# Altium PCB 468524-L.PcbDoc (part 4 of 4)
Units mm, origin at the board's own origin, x right, y up, seen from the top; angles counter-clockwise.
Board outline 160 x 90 mm, 2 copper layers (Top Layer, Bottom Layer), stack 1.571 mm thick; 225 components, 131 nets, 717 pads, 560 vias.
Unrouted connection lines stored in the file: 2.
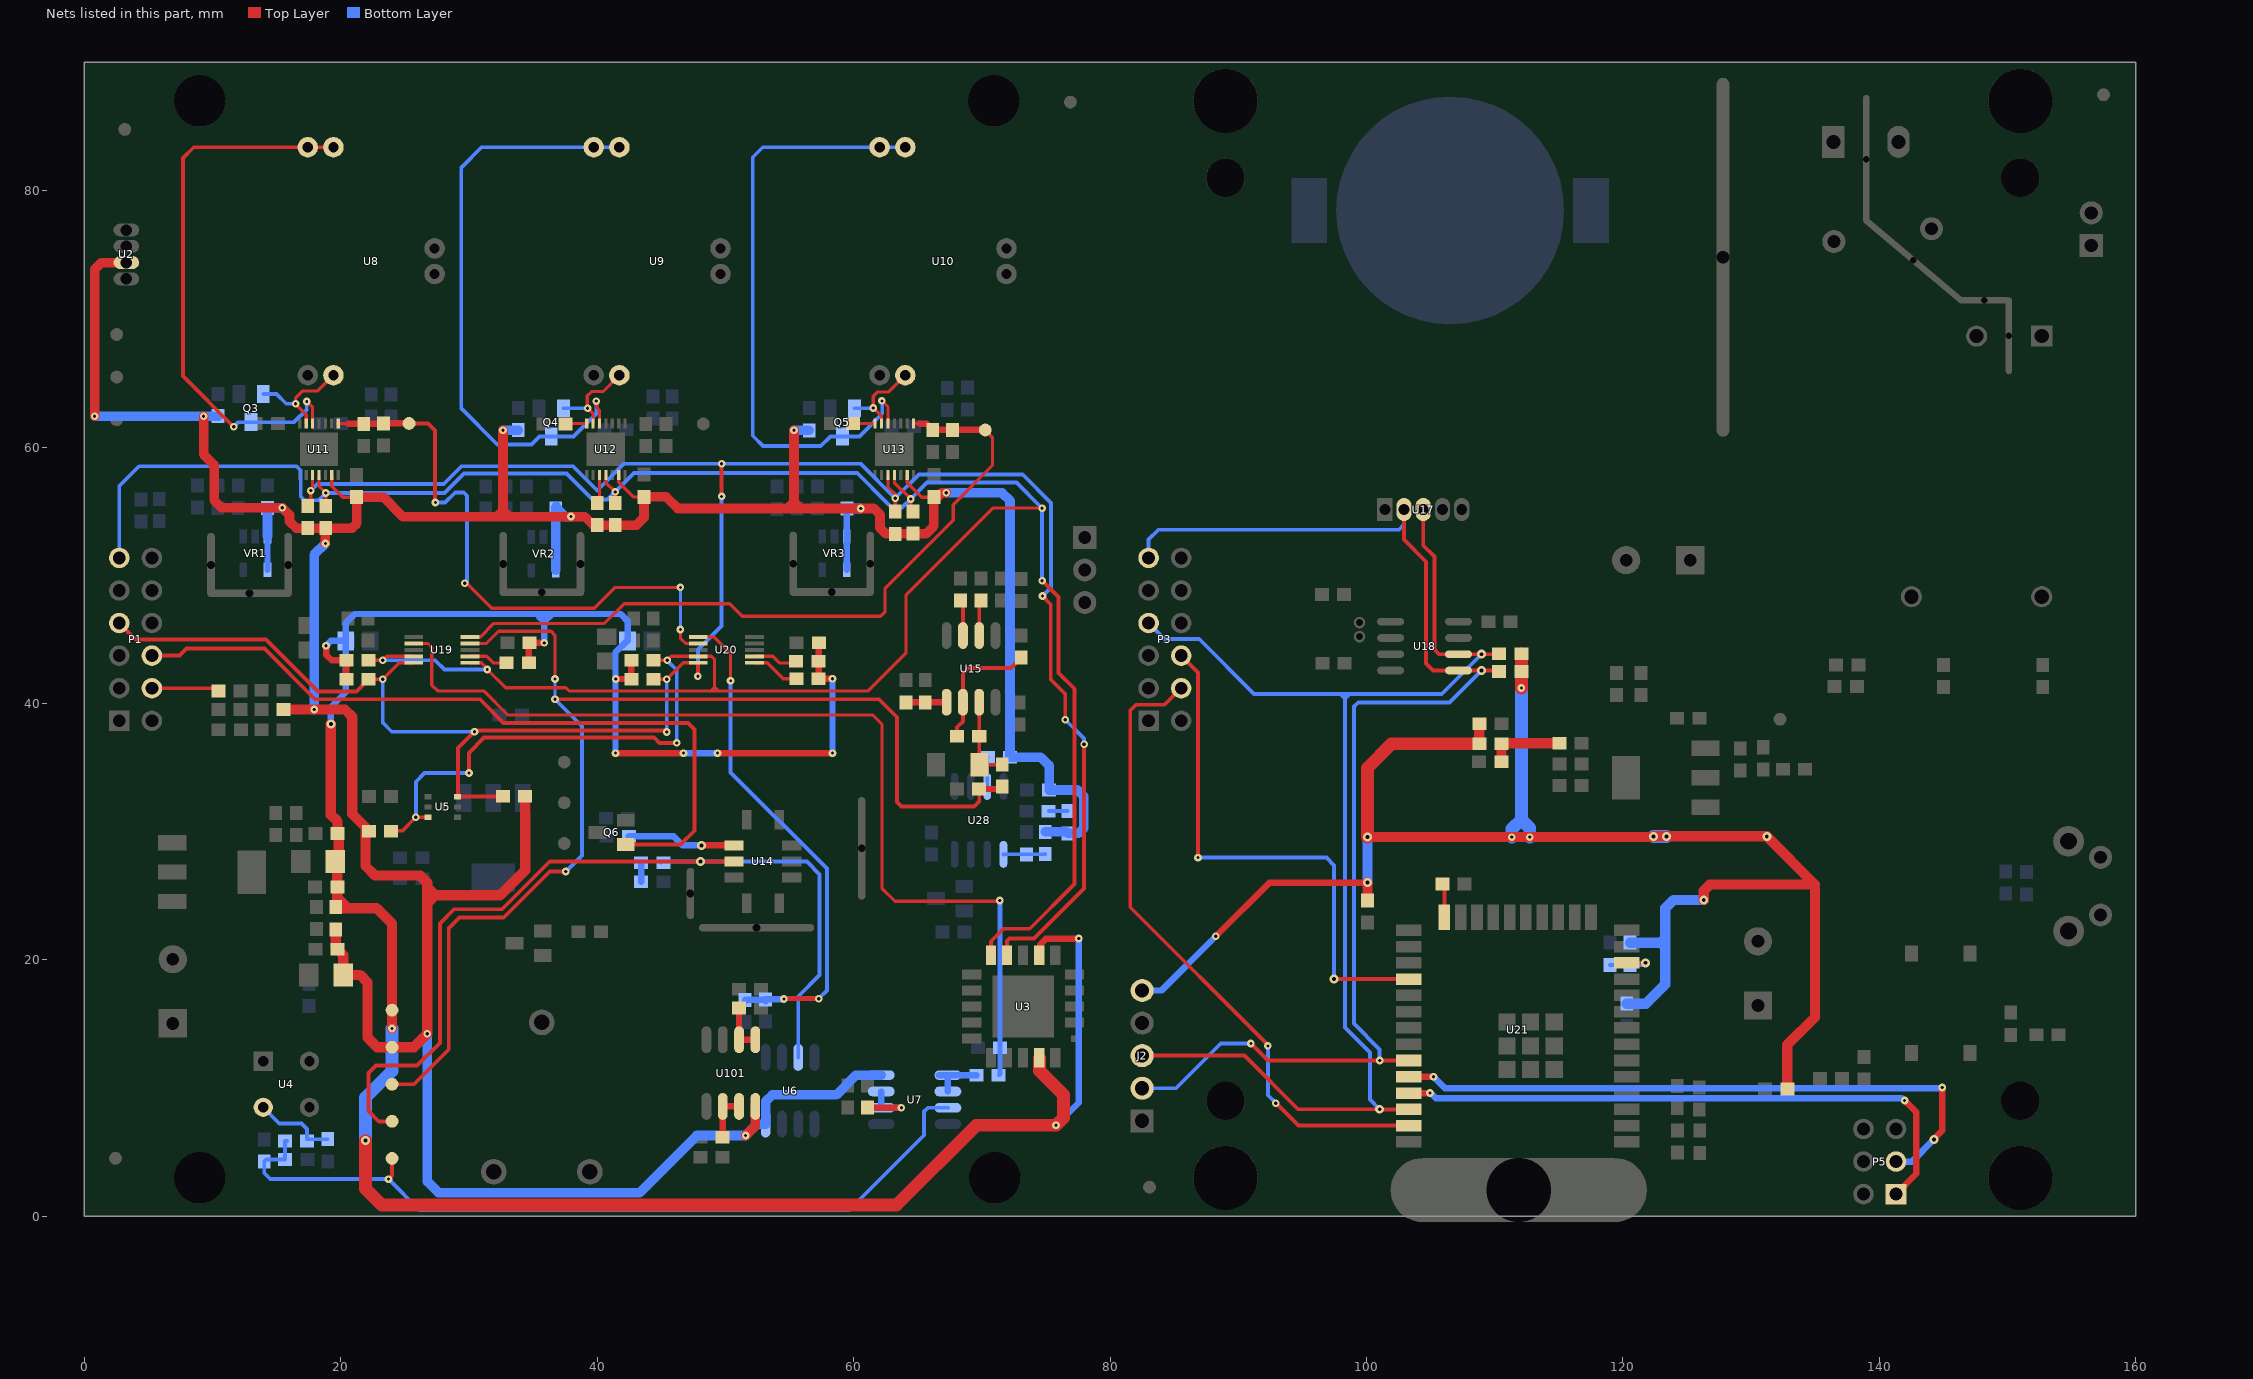
[diagram p3: the nets of this part, all layers, seen from the top]

## Via types
v1: diameter 0.6, hole 0.25, Top Layer to Bottom Layer, tented both sides, 365 vias
v2: diameter 0.7, hole 0.3, Top Layer to Bottom Layer, tented both sides, 179 vias
v3: diameter 0.6, hole 0.2, Top Layer to Bottom Layer, 12 vias
v4: diameter 0.6, hole 0.2, Top Layer to Bottom Layer, tented both sides, 3 vias
v5: diameter 0.6, hole 0.3, Top Layer to Bottom Layer, tented both sides, 1 vias

## Nets (pads, with @x,y where several pads share a name; then routed paths per layer and width w, separated by ;. In a path a pad name is that pad's centre, name@x,y a point inside that pad or via, vN(x,y) a via of type N, cw(c..) or ccw(c..) an arc to the next point about the centre after c; other vN are vias at no path point) (continued)
NetR18_2: R18.2 U7.1 U7.2 | length 4.2
  Bottom Layer w0.5: U7.1@66.647,11.005 U7.1@67.347,11.005 ; U7.2@67.347,9.735 U7.1@67.347,11.005 ; R18.2@69.58,11 69.575,11.005 U7.1@67.347,11.005
NetR19_2: R19.2 U15.2 | length 2.8
  Top Layer w0.3: U15.2@69.791,45.295 69.791,47.871 R19.2@69.931,48.011
NetR21_1: R21.1 R22.2 U4.2 | length 6.5
  Bottom Layer w0.3: R22.2@17.366,6.014 R21.1@18.975,6.014
  Bottom Layer w0.305: U4.2@13.952,8.5 15.202,7.25 16.925,7.25 17.366,6.809 R22.2@17.366,6.014
NetR33_2: R33.2 U15.3 | length 2.8
  Top Layer w0.3: R33.2@68.336,48.011 68.521,47.826 U15.3@68.521,45.295
NetR35_2: R35.2 U14.2 | length 8.5
  Top Layer w0.5: v2(48.125,28.925) U14.2@50.675,28.925
  Bottom Layer w0.5: R35.2@42.464,29.645 45.955,29.645 46.675,28.925 v2(48.125,28.925)
NetR37_1: R37.1 R38.2 | length 1.5
  Bottom Layer w0.5: R38.2@43.431,26.093 R37.1@43.431,27.587
NetR41_2: R41.2 U12.3 | length 2.3
  Top Layer w0.2: R41.2@39.993,55.639 R41.2@40.175,55.821
  Top Layer w0.25: R41.2@40.175,55.821 U12.3@40.175,57.825
NetR43_2: R43.2 U12.14 | length 1.6
  Top Layer w0.229: R43.2@37.539,61.8 R43.2@37.564,61.825
  Top Layer w0.25: R43.2@37.564,61.825 U12.14@39.175,61.825
NetR49_2: R49.2 U13.14 | length 1.7
  Top Layer w0.25: R49.2@59.966,61.839 59.98,61.825 U13.14@61.675,61.825
NetR52_2: R52.2 R54.2 U15.5 | length 3.2
  Top Layer w0.5: R52.2@64.075,40.086 R54.2@65.575,40.086 67.242,40.086 U15.5@67.251,40.095
NetR53_2: R53.2 R55.1 U15.6 | length 10.1
  Top Layer w0.3: R55.1@68.067,37.446 68.067,38.142 68.521,38.596 U15.6@68.521,40.095 68.521,42.321 68.975,42.775 72.264,42.775 R53.2@73.075,43.586
NetR55_2: R55.2 R57.1 U15.7 ZD1.2 | length 6.6
  Top Layer w0.3: U15.7@69.791,40.095 69.791,37.45 R55.2@69.795,37.446 69.795,35.257 ZD1.2@69.831,35.221 71.568,35.221 R57.1@71.581,35.234
NetR58_2: R58.2 U28.3 | length 2.3
  Bottom Layer w0.3: U28.3@70.414,33.527 70.414,35.752 R58.2@70.461,35.8
NetR59_1: R59.1 R86.2 | length 1.5
  Bottom Layer w0.305: R86.2@75.214,31.593 75.222,31.602 R59.1@76.7,31.602
NetR60_1: R60.1 R71.2 U28.5 | length 3.3
  Bottom Layer w0.3: U28.5@71.684,28.227 71.691,28.234 R71.2@73.486,28.234 74.923,28.234 R60.1@74.948,28.259
NetR63_2: R63.2 U19.2 | length 3.1
  Top Layer w0.25: U19.2@30.075,43.675 31.375,43.675 31.885,43.165 R63.2@32.937,43.165
NetR66_2: R66.2 U20.2 | length 3.7
  Top Layer w0.25: U20.2@52.263,43.675 53.7,43.675 54.21,43.165 55.512,43.165 R66.2@55.327,43.35
NetR67_2: R67.2 U20.1 | length 3.8
  Top Layer w0.25: U20.1@52.263,43.175 53.25,43.175 54.5,41.925 R67.2@55.536,41.925
NetR75_2: R75.2 U21.24 | length 2.6
  Top Layer w0.3: R75.2@106.075,25.925 R75.2@106.077,25.923
  Top Layer w0.305: U21.24@106.077,23.312 R75.2@106.077,25.923
NetR114_2: R114.2 U7.6 U7.7 | length 5.6
  Top Layer w0.5: R114.2@61.075,8.65 61.26,8.465 v1(63.72,8.465)
  Bottom Layer w0.5: U7.7@62.147,9.735 U7.6@62.147,8.465 v1(63.72,8.465)
NetR115_2: R115.2 U101.1 U101.2 | length 3.7
  Top Layer w0.5: R115.2@51.061,16.25 51.06,16.249 U101.2@51.06,13.775 U101.1@52.33,13.775
NetR116_2: R116.2 U101.6 U101.7 | length 3.7
  Top Layer w0.5: R116.2@49.789,6.175 49.79,6.176 U101.6@49.79,8.575 U101.7@51.06,8.575
O3_VOUT: C11.2 C12.2 T12.1 U11.8 U20.7 | length 46.9
  Top Layer w0.25: U11.8@19.8,61.825 20.575,61.825 ; v1(29.675,49.381) 29.821,49.381 31.777,47.425 39.78,47.425 41.407,49.052 v1(46.486,49.052) ; v1(46.486,45.76) 46.486,45.086 46.897,44.675 U20.7@47.863,44.675
  Top Layer w0.3: T12.1@25.325,61.839 26.813,61.839 27.35,61.302 27.35,55.7 v1(27.375,55.675)
  Top Layer w0.5: 20.575,61.825 23.311,61.825 C12.2@23.325,61.839 T12.1@25.325,61.839
  Bottom Layer w0.25: v1(46.486,45.76) v1(46.486,49.052)
  Bottom Layer w0.3: v1(27.375,55.675) 28.134,55.675 28.924,56.465 29.586,56.465 29.855,56.197 v1@29.855,49.442
P_MICS: P3.9 U21.28 | length 41.9
  Top Layer w0.305: P3.9@85.545,43.73 86.85,42.425 v1(86.85,27.975) ; v2(97.475,18.5) 103.29,18.5 U21.28@103.292,18.502
  Bottom Layer w0.305: v1(86.85,27.975) 96.875,27.975 97.475,27.375 v2(97.475,18.5)
PHT_MICS: P1.9 Q6.1 | length 58.8
  Top Layer w0.3: P1.9@5.265,43.73 7.43,43.73 7.975,44.275 14.05,44.275 18,40.325 30.85,40.325 32.7,38.475 47.075,38.475 47.575,37.975 47.575,30.075 46.49,28.99 Q6.1@42.225,28.99
RED_0: P3.8 U21.37 | length 51.1
  Top Layer w0.305: P3.8@85.545,41.19 84.255,39.9 82.025,39.9 81.575,39.45 81.575,24.104 92.307,13.372 v1(92.307,13.292) ; v1(92.925,8.825) 94.678,7.072 U21.37@103.292,7.072
  Bottom Layer w0.305: v1(92.307,13.292) 92.307,9.443 v1(92.925,8.825)
RED_I: P1.8 R6.1 | length 5.3
  Top Layer w0.3: P1.8@5.265,41.19 R6.1@10.246,41.19
  Top Layer w0.305: R6.1@10.246,41.19 R6.1@10.461,40.975
RH2S: Q4.2 U9.4 U12.13 | length 7.4
  Top Layer w0.25: U12.13@39.675,61.825 39.675,62.6 v1(39.25,63.025) 39.225,63.05 39.225,64 39.55,64.325 40.45,64.325 U9.4@41.725,65.6
  Bottom Layer w0.3: Q4.2@37.363,63.025 v1(39.25,63.025)
RO3: Q3.2 U8.4 U11.13 | length 8.9
  Top Layer w0.25: U11.13@17.3,61.825 17.3,62.525 16.476,63.349 v1(16.476,63.378) 16.476,63.828 17.023,64.375 18.2,64.375 U8.4@19.425,65.6
  Bottom Layer w0.3: Q3.2@13.958,64.137 14.988,64.137 15.747,63.378 v1(16.476,63.378)
RSO2: Q5.2 U10.4 U13.13 | length 7
  Top Layer w0.25: U13.13@62.175,61.825 62.175,62.4 v1(61.525,63.05) 61.525,63.957 61.868,64.3 62.725,64.3 U10.4@64.025,65.6
  Bottom Layer w0.3: Q5.2@60.075,63.025 61.5,63.025 v1(61.525,63.05)
RXD: P5.3 U21.34 | length 50
  Top Layer w0.5: U21.34@103.292,10.882 v1(105.229,10.882) ; v2(144.265,6) 144.265,6.054 144.907,6.696 v1(144.907,10.049)
  Bottom Layer w0.5: v1(105.229,10.882) 106.137,9.974 144.831,9.974 v1(144.907,10.049) ; P5.3@141.295,4.272 142.537,4.272 v2(144.265,6)
SCL: P1.4 R12.2 R17.1 R47.2 R64.2 R68.2 U3.9 U5.6 U11.3 U13.3 U19.10 U20.10 | length 196.8
  Top Layer w0.25: R12.2@17.429,55.401 17.425,55.405 17.65,55.63 v1(17.65,56.6) 17.8,56.75 U11.3@17.8,57.825 ; R64.2@22.164,41.895 v1(23.27,41.895) 24.55,43.175 U19.10@25.675,43.175 ; R68.2@44.384,41.895 v1(45.42,41.895) 46.7,43.175 U20.10@47.863,43.175 ; U13.3@62.675,57.825 62.675,56.879 63.236,56.318 v1(63.236,56) R47.2@63.236,54.957
  Top Layer w0.3: P1.4@2.725,46.27 3.995,45 14.16,45 18.216,40.944 21.213,40.944 R64.2@22.164,41.895 ; U5.6@29.115,32.725 U5.6@29.133,32.743 ; R17.1@32.631,32.743 U5.6@29.133,32.743 ; v1(45.42,37.775) 45.313,37.882 30.516,37.882 29.151,36.517 29.151,32.761 U5.6@29.133,32.743 ; v1(47.85,42.125) U20.10@47.85,43.15 ; v1(49.7,56.15) v1(49.7,58.7) ; U3.9@71.965,20.364 71.965,21.482 72.147,21.664 74.065,21.664 77.975,25.573 v5(77.975,36.821) ; v1(74.725,48.375) 75.375,47.725 75.375,41.875 76.505,40.745 v1(76.505,38.725)
  Top Layer w0.5: R17.1@32.631,32.743 R17.1@32.649,32.761
  Bottom Layer w0.25: v1(45.42,37.775) v1(45.42,41.895)
  Bottom Layer w0.3: v1(17.65,56.6) 18.175,57.125 28.028,57.125 29.403,58.5 38.1,58.5 40,56.6 42.1,58.7 v1(49.7,58.7) 60.536,58.7 v1(63.236,56) 65.086,57.85 73.184,57.85 75.4,55.634 75.4,49.05 v1(74.725,48.375) ; v1(23.27,41.895) 23.27,38.5 23.976,37.794 v1(30.428,37.794) ; v1(47.85,42.125) 47.85,44.2 49.7,46.05 v1(49.7,56.15) ; v1(76.505,38.725) 77.975,37.255 v5(77.975,36.821)
SCL_0: J2.3 P3.4 R61.1 U17.3 U18.6 U21.36 | length 102.8
  Top Layer w0.3: U17.3@104.425,55.125 104.425,52.325 105.3,51.45 105.3,44.2 105.659,43.841 U18.6@107.175,43.841 v2(108.954,43.841) 110.316,43.841 R61.1@110.35,43.875
  Top Layer w0.305: J2.3@82.5,12.53 90.47,12.53 94.65,8.35 v2(101.025,8.35) ; v2@101.025,8.342 U21.36@103.292,8.342
  Bottom Layer w0.3: P3.4@83.005,46.27 84.25,45.025 86.95,45.025 91.225,40.75 97.975,40.75 ; 98.325,40.35 98.325,14.725 100.275,12.775 100.275,9.1 v2(101.025,8.35) v2@101.125,8.25 ; v2(108.954,43.841) 105.864,40.75 98.675,40.75 ; 97.975,40.75 98.675,40.75 ; 97.975,40.75 98.325,40.4 98.675,40.75
SDA: P1.6 R11.2 R13.1 R40.2 R46.2 R65.2 R69.2 U3.10 U5.3 U11.4 U12.4 U13.4 U19.1 U19.9 U20.9 | length 243.3
  Top Layer w0.25: U11.4@18.3,57.825 18.3,56.95 v1(18.829,56.421) R11.2@18.829,55.401 ; R65.2@22.164,43.365 v1(23.265,43.365) 23.575,43.675 U19.9@25.675,43.675 ; U19.1@30.075,43.175 30.95,43.175 31.425,42.7 v4(31.425,42.65) 32.85,41.225 37.55,41.225 37.8,40.975 48.875,40.975 ; U12.4@40.675,57.825 40.675,57.225 v1(41.4,56.5) R40.2@41.4,55.639 ; R69.2@44.352,43.365 R69.2@44.384,43.365 v1(45.454,43.365) 45.763,43.675 U20.9@47.863,43.675 48.9,43.675 49.15,43.425 49.15,41.25 ; U13.4@63.175,57.825 63.175,57.225 v1(64.45,55.95) 64.45,55.139 R46.2@64.625,54.964 ; v1@74.425,55.25 70.895,55.25 64.075,48.43 64.075,43.9 61.15,40.975 49.425,40.975 ; 48.875,40.975 49.425,40.975 ; 48.875,40.975 49.15,41.25 ; 49.15,41.25 49.425,40.975
  Top Layer w0.3: R13.1@23.913,30.029 23.96,30.075 24.8,30.075 v1(25.85,31.125) ; U3.10@70.711,20.95 70.724,20.964 70.724,21.388 70.75,21.414 70.75,21.497 71.678,22.425 73.735,22.425 77.215,25.906 77.215,41.141 75.982,42.375 75.982,48.293 v1(74.7,49.575)
  Top Layer w0.305: v1(25.85,31.125) U5.3@26.815,31.125 ; v1(30.001,34.575) 30.001,36.151 31.179,37.329 44.446,37.329 44.85,36.925 v1(46.2,36.925)
  Bottom Layer w0.3: P1.6@2.725,51.35 2.725,56.95 4.275,58.5 16.55,58.5 16.875,58.175 16.875,56.15 17.175,55.85 18.258,55.85 v1(18.829,56.421) 28.102,56.421 29.606,57.925 37.6,57.925 39.625,55.9 40.8,55.9 v1(41.4,56.5) 42.875,57.975 60.275,57.975 62.536,55.714 62.536,55.71 62.971,55.275 63.775,55.275 v1(64.45,55.95) 65.725,57.225 72.7,57.225 v1(74.7,55.225) v1(74.7,49.575) ; v1(23.265,43.365) 27.36,43.365 28.075,42.65 v4(31.425,42.65)
  Bottom Layer w0.305: v1(25.85,31.125) 25.85,33.894 26.531,34.575 v1(30.001,34.575) ; v1(45.454,43.365) 46.2,42.619 v1(46.2,36.925)
SDA_0: J2.2 P3.6 R62.1 U17.2 U18.5 U21.33 | length 104
  Top Layer w0.3: U18.5@107.175,42.571 v2(108.954,42.571) 110.274,42.571 R62.1@110.35,42.495
  Top Layer w0.305: v1(90.979,13.48) 92.307,12.152 v1(101.025,12.152) U21.33@103.292,12.152 ; U17.2@102.925,55.125 102.925,52.775 104.65,51.05 104.65,43.1 105.179,42.571 U18.5@107.175,42.571
  Bottom Layer w0.3: P3.6@83.005,51.35 83.005,52.785 83.77,53.55 102.525,53.55 102.925,53.95 U17.2@102.925,55.125 ; 99.025,39.75 99.35,40.075 106.459,40.075 v2(108.954,42.571)
  Bottom Layer w0.305: J2.2@82.5,9.99 85.143,9.99 88.633,13.48 v1(90.979,13.48) ; 99.025,39.75 99.025,15.025 101.025,13.025 v1(101.025,12.152)
SO2_VOUT: C38.2 C39.2 T14.1 U13.8 U19.5 | length 58.1
  Top Layer w0.25: U19.5@29.649,45.175 U19.5@30.075,45.175 30.875,45.175 31.94,46.24 40.569,46.24 42.104,47.775 50.325,47.775 51.3,46.8 62.1,46.8 62.45,47.15 62.45,48.976 67.766,54.292 67.766,55.506 70.817,58.557 70.817,60.772 T14.1@70.264,61.325 T14.1@70.249,61.339 ; U13.8@64.675,61.825 65.15,61.825
  Top Layer w0.5: 65.15,61.825 65.689,61.825 C38.2@66.175,61.339 C39.2@67.701,61.339 T14.1@70.249,61.339
T_ADC: R80.2 R81.1 U21.12 | length 4.4
  Top Layer w0.3: U21.12@120.292,19.772 120.295,19.775 v2(121.75,19.775)
  Bottom Layer w0.305: R81.1@118.996,19.616 R80.2@120.551,19.616 121.678,19.616 v2@121.837,19.775
TXD: P5.1 U21.35 | length 47.2
  Top Layer w0.5: U21.35@103.292,9.612 v1(104.95,9.612) ; P5.1@141.295,1.732 142.875,3.312 142.875,8.129 v1(141.969,9.036)
  Bottom Layer w0.5: v1(104.95,9.612) 105.004,9.612 105.392,9.224 141.726,9.224 141.914,9.036 v1(141.969,9.036)
V3P3: C3.1 C4.2 C43.2 C46.2 C56.2 FB1.2 FB2.2 L1.1 L7.1 R9.1 R63.1 R64.1 R65.1 R66.1 R67.1 R68.1 R69.1 R72.1 T1.1 U3.7 U3.19 | length 212.9
  Top Layer w0.3: U3.7@74.465,20.364 U3.7@74.548,20.447 ; 74.994,21.639 75.019,21.664
  Top Layer w0.5: v1(18.85,44.5) 18.85,43.806 19.29,43.365 R65.1@20.436,43.365 R64.1@20.436,41.895 ; R63.1@34.65,43.151 R63.1@34.654,43.155 ; R63.1@34.664,43.165 34.664,44.675 C43.2@34.714,44.725 v1(35.875,44.725) ; v1(41.425,36.125) v1(46.725,36.125) ; v1(41.439,41.904) R68.1@42.657,41.904 ; R69.1@42.647,43.375 R69.1@42.657,43.365 R68.1@42.657,41.904 ; R68.1@42.657,41.895 R68.1@42.657,41.904 ; R68.1@42.661,41.904 R68.1@42.657,41.904 ; v1(49.375,36.125) v1(58.35,36.125) ; R67.1@57.264,41.825 R67.1@57.264,41.875 ; R67.1@57.264,41.9 R67.1@57.264,41.925 ; C46.2@57.289,44.725 57.264,44.699 R67.1@57.264,41.925 ; v1(58.35,41.925) R67.1@57.264,41.925 ; U3.7@74.548,20.447 74.548,21.193 74.994,21.639 ; 75.019,21.664 76.963,21.664 v1(77.547,21.664)
  Top Layer w0.8: v2(19.225,38.4) 19.225,31.325 19.752,30.798 R9.1@19.752,29.85 ; 19.712,24.874 19.724,24.862 ; R9.1@19.85,29.588 19.85,27.955 C3.1@19.581,27.686 19.724,27.543 C4.2@19.724,25.683 19.724,24.862 ; v1(24,14.65) T1.1@24,16.082 24,22.825 22.79,24.035 20.55,24.035 ; C56.2@110.51,35.445 110.523,35.459 L7.1@110.523,36.851 110.567,36.895 R72.1@115.032,36.895 ; 19.724,24.862 20.55,24.035 ; 19.724,24.862 19.724,24.147 19.612,24.035 20.55,24.035
  Top Layer w1: v2(21.925,5.9) 21.925,2.15 23.2,0.875 63.35,0.875 69.575,7.1 v1(75.78,7.1) 76.365,7.686 76.365,9.485 74.504,11.346 U3.19@74.504,12.325
  Bottom Layer w0.5: v1(18.85,44.5) 19.225,44.875 FB2.2@20.397,44.875 ; v2(19.225,38.4) 19.225,39.7 20.397,40.872 FB2.2@20.397,44.875 ; 35.425,46.825 35.875,46.375 36.475,46.975 ; v1(35.875,44.725) 35.875,46.225 ; v1(41.425,36.125) 41.425,43.983 FB1.2@42.317,44.875 ; FB1.2@42.364,44.875 42.364,46.436 41.825,46.975 36.475,46.975 ; v1(46.725,36.125) v1(49.375,36.125) ; v1(58.35,36.125) v1(58.35,41.925) ; v1(75.78,7.1) 77.547,8.868 v1(77.547,21.664) ; FB2.2@20.397,44.875 20.397,46.272 21.1,46.975 36.475,46.975
  Bottom Layer w1: v2(21.925,5.9) 21.925,9.26 24,11.335 v1(24,14.65)
V3P3_D: C67.2 J2.5 L3.1 L7.2 R61.2 R62.2 R74.1 R76.1 R80.1 | length 138.6
  Top Layer w0.5: v1(88.24,21.839) 92.426,26.025 v2(100.075,26.025)
  Top Layer w0.8: R76.1@100.075,24.639 v2(100.075,26.025) ; v2(100.075,29.575) v1(111.325,29.575) v1(112.732,29.575) 122.333,29.575 v2(122.392,29.634) v2(123.387,29.634) v2(131.216,29.634) 134.975,25.875 ; L7.2@108.796,36.851 108.796,38.426 C67.2@108.81,38.426 ; v2(126.3,24.675) 126.3,25.406 126.769,25.875 134.875,25.875 134.925,25.925 ; L3.1@132.814,9.925 132.814,13.37 134.975,15.532 134.975,25.576
  Top Layer w1: v2(100.075,29.575) 100.075,34.97 101.956,36.851 L7.2@108.796,36.851 ; v1(112.077,41.2) R62.2@112.077,42.495 R61.2@112.077,43.875
  Bottom Layer w0.5: J2.5@82.5,17.61 84.011,17.61 v1(88.24,21.839)
  Bottom Layer w0.8: v2(100.075,26.025) v2(100.075,29.575) ; R74.1@120.3,16.589 121.789,16.589 123.3,18.1 123.3,20.982 ; R80.1@120.551,21.344 122.939,21.344 ; v2(126.3,24.675) 123.95,24.675 123.3,24.025 123.3,21.705 ; 122.939,21.344 123.3,20.982 ; 122.939,21.344 123.3,21.705 ; 123.3,20.982 123.3,21.705
  Bottom Layer w1: v1(111.325,29.575) 111.325,30.198 112.077,30.95 ; v1(112.077,41.2) 112.077,30.95 ; v1(112.732,29.575) 112.732,30.295 112.077,30.95 ; v2(122.392,29.634) v2(123.387,29.634)
V3P3_S: C2.1 C5.2 C7.2 C14.2 C21.2 C25.2 C32.2 C34.2 C41.2 L1.2 R4.1 R11.1 R12.1 R13.2 R17.2 R40.1 R41.1 R46.1 R47.1 R58.1 R59.2 R60.2 R111.2 R112.2 R113.2 T2.1 U2.2 U6.8 U7.8 U11.6 U12.6 U13.6 U101.8 VR1.3 VR1.4 VR2.3 VR2.4 VR3.3 VR3.4 | length 317.3
  Top Layer w0.25: U11.6@19.3,57.825 19.3,56.925 20.139,56.086 C14.2@21.225,56.086 ; U12.6@41.675,57.825 41.675,57.25 42.814,56.111 C32.2@43.65,56.111 ; U13.6@64.175,57.825 64.175,57.225 65.314,56.086 C41.2@66.261,56.086
  Top Layer w0.75: v1(0.8,62.4) 0.8,73.858 1.325,74.383 U2.2@3.275,74.383 ; v1(9.3,62.4) 9.3,59.425 10.125,58.6 10.125,55.85 10.714,55.261 v1(15.439,55.261) 16,54.7 16,54.2 16.527,53.673 R12.1@17.429,53.673 R11.1@18.829,53.673 ; R11.1@18.75,53.594 R11.1@18.8,53.644 ; v1(18.8,52.482) R11.1@18.8,53.644 ; 32.2,54.6 32.65,55.05 ; v1(32.65,61.311) 32.65,55.05 ; 32.675,55.075 32.65,55.05 ; v1(51.575,6.3) 52.33,7.055 U101.8@52.33,8.575 ; v1(55.351,61.301) 55.351,55.703 ; v1(67.225,56.425) 66.885,56.425 66.546,56.086 C41.2@66.261,56.086 66.261,53.847 65.643,53.229 R47.1@63.236,53.229 62.521,53.229 62.05,53.7 62.05,54.725 61.573,55.202 v1(60.55,55.202) 55.851,55.202 ; R11.1@18.8,53.644 R11.1@18.829,53.673 ; R11.1@18.829,53.673 20.873,53.673 21.25,54.05 21.25,56.061 C14.2@21.225,56.086 23.314,56.086 24.825,54.575 33.125,54.575 ; 32.65,55.05 33.125,54.575 ; 33.125,54.575 v1(37.95,54.575) 39.025,54.575 39.689,53.911 R41.1@39.993,53.911 R40.1@41.4,53.911 43.061,53.911 43.65,54.5 C32.2@43.65,56.111 45.384,56.111 46.293,55.202 54.85,55.202 ; 54.85,55.202 55.851,55.202 ; 54.85,55.202 55.351,55.703 ; 55.351,55.703 55.851,55.202
  Top Layer w0.8: R4.1@15.539,39.525 v1(17.925,39.525) 20.325,39.525 20.898,38.952 20.898,38.557 20.898,37.148 20.898,32.475 20.898,31.377 21.925,30.35 21.925,29.871 21.925,27.325 22.675,26.575 26.2,26.575 26.75,26.025 26.75,25.625 26.75,24.441 v1(26.75,14.241) 25.7,13.191 T2.1@24,13.191 22.848,13.191 22.075,13.964 22.075,18.254 21.504,18.825 C2.1@20.196,18.825 20.196,20.368 C5.2@19.739,20.825 19.6,20.964 L1.2@19.6,22.386 ; 26.776,24.441 27.368,25.033 ; 26.776,25.625 27.368,25.033 ; R17.2@34.392,32.75 34.392,27 32.425,25.033 27.368,25.033
  Bottom Layer w0.5: v1(9.3,62.4) v1@9.311,62.411 ; R111.2@10.425,62.286 R111.2@10.425,62.411 ; VR1.4@14.282,50.429 VR1.3@14.282,53.029 ; VR3.4@59.452,50.424 59.475,50.447 C34.2@59.475,55.201 59.475,55.316 C34.2@59.589,55.202 ; R59.2@76.588,29.987 R59.2@76.7,29.875
  Bottom Layer w0.75: v1(0.8,62.4) v1(9.3,62.4) ; v1@9.311,62.411 R111.2@10.425,62.411 ; VR1.3@14.282,53.029 C7.2@14.282,55.261 v1(15.439,55.261) ; v1(17.925,39.525) 17.925,51.607 v1(18.8,52.482) ; v1(26.75,14.241) 26.75,2.715 27.615,1.85 43.326,1.85 47.776,6.3 v1(51.575,6.3) 52.47,7.195 U6.8@53.136,7.195 53.136,8.961 53.65,9.475 58.65,9.475 60.18,11.005 U7.8@62.147,11.005 ; v1(32.65,61.311) R112.2@33.844,61.311 ; VR2.4@36.763,50.374 VR2.3@36.763,52.974 C25.2@36.763,55.201 ; C25.2@36.815,55.375 36.756,55.316 37.496,54.575 v1(37.95,54.575) ; v1(55.351,61.301) R113.2@56.525,61.301 ; C34.2@59.589,55.202 v1(60.55,55.202) ; v1(67.225,56.425) 71.575,56.425 72.189,55.811 R58.1@72.189,35.8 74.6,35.8 75.239,35.161 C21.2@75.239,33.25 77.45,33.25 77.948,32.752 77.948,30.275 77.547,29.875 R59.2@76.7,29.875 ; R60.2@74.948,29.987 R59.2@76.588,29.987
V_CO: C66.2 R57.2 T8.1 U19.4 | length 96.4
  Top Layer w0.25: U19.4@30.075,44.675 31.35,44.675 32.3,45.625 36.4,45.625 36.7,45.325 v1(36.7,41.9)
  Top Layer w0.3: T8.1@24,10.3 25.7,10.3 28.425,13.025 28.425,22.475 29.262,23.312 32.712,23.312 36.3,26.9 v1(37.55,26.9) ; v1(36.7,40.325) 61.975,40.325 63.375,38.925 63.375,32.3 63.725,31.95 69.4,31.95 69.789,32.339 C66.2@69.789,33.325
  Top Layer w0.5: C66.2@69.789,33.325 71.4,33.325 R57.2@71.581,33.506
  Bottom Layer w0.25: v1(36.7,40.325) 36.7,41.896 36.702,41.898 v1(36.7,41.9)
  Bottom Layer w0.3: v1(36.7,40.325) 38.8,38.225 38.8,28.15 v1(37.55,26.9)
V_LPG: C20.2 R18.1 U19.7 | length 77
  Top Layer w0.25: U19.7@25.675,44.675 26.8,44.675 27.1,44.375 27.1,41.431 27.556,40.975 31.147,40.975 33.022,39.1 61.497,39.1 62.2,38.397 62.2,25.6 63.225,24.575 71.339,24.575 v1(71.389,24.625)
  Bottom Layer w0.305: R18.1@71.314,11 R18.1@71.414,11.101
  Bottom Layer w0.381: v1(71.389,24.625) 71.414,24.6 C20.2@71.414,13.15 R18.1@71.414,11.101
V_NO2: C18.2 R16.1 U20.6 | length 39.1
  Top Layer w0.25: U20.6@47.863,45.175 49.125,45.175 50.4,43.9 v4(50.4,41.775)
  Top Layer w0.305: v1(54.556,16.95) v1@54.581,16.975
  Top Layer w0.381: v1@54.581,16.975 v1(57.275,16.975)
  Bottom Layer w0.305: v4(50.4,41.775) 50.4,34.625 57.905,27.12 57.905,17.605 v1(57.275,16.975)
  Bottom Layer w0.5: C18.2@51.531,16.767 C18.2@51.532,16.765 ; C18.2@51.531,16.881 53.015,16.881 R16.1@53.131,16.765 ; R16.1@53.131,16.929 v1@54.534,16.929
VO_LPG: C17.2 R22.1 R23.2 T5.1 U7.3 | length 64.7
  Top Layer w0.305: v1(23.725,2.9) 24,3.175 T5.1@24,4.517
  Bottom Layer w0.3: R22.1@15.802,5.875 R22.1@15.827,5.85
  Bottom Layer w0.305: R22.1@15.639,5.875 15.639,4.45 R23.2@15.664,4.425 14.191,4.425 C17.2@14.027,4.261 14.027,3.373 14.5,2.9 v1(23.725,2.9) 26.15,0.475 59.65,0.475 65.5,6.325 65.5,8.18 65.785,8.465 U7.3@67.347,8.465
VO_NO2: R37.2 T11.1 U6.3 U14.3 | length 73.7
  Top Layer w0.305: T11.1@24,7.408 22.958,7.408 22.167,8.2 22.167,11.166 22.75,11.75 25.956,11.75 27.725,13.519 27.725,22.844 28.831,23.95 32.569,23.95 36.294,27.675 v2(48.05,27.675) 48.075,27.675 U14.3@50.675,27.675
  Bottom Layer w0.3: R37.2@44.995,27.587 R37.2@45.082,27.675 ; U6.3@55.676,12.395 U6.3@55.681,12.4
  Bottom Layer w0.305: R37.2@45.082,27.675 v2(48.05,27.675) 56.35,27.675 57.35,26.675 57.35,18.825 55.676,17.151 U6.3@55.676,12.395
WH2S: Q4.3 U9.1 U9.6 U12.12 | length 47.3
  Top Layer w0.25: v1(39.927,63.578) 39.927,63.123 40.175,62.875 U12.12@40.175,61.825
  Bottom Layer w0.3: v1(39.927,63.578) 39.95,63.555 39.95,62.625 38.15,60.825 Q4.3@36.413,60.825 35.5,60.825 34.875,60.2 32.203,60.2 29.4,63.003 29.4,81.8 30.98,83.38 U9.6@39.725,83.38 U9.1@41.725,83.38
WO3: Q3.3 U8.1 U8.6 U11.12 | length 43.5
  Top Layer w0.25: v4(17.35,63.55) 17.8,63.1 U11.12@17.8,61.825
  Top Layer w0.3: v1(11.65,61.575) 7.7,65.525 7.7,82.55 8.53,83.38 U8.6@17.425,83.38 U8.1@19.425,83.38
  Bottom Layer w0.3: v1(11.65,61.575) 12.012,61.937 Q3.3@13.008,61.937 16.362,61.937 17.35,62.925 v4(17.35,63.55)
WSO2: Q5.3 U10.1 U10.6 U13.12 | length 48.4
  Top Layer w0.25: v1(62.2,63.6) 62.675,63.125 U13.12@62.675,61.825
  Bottom Layer w0.3: v1(62.2,63.6) 62.225,63.575 62.225,62.6 60.45,60.825 Q5.3@59.125,60.825 58.179,60.825 57.429,60.075 52.925,60.075 52.125,60.875 52.125,82.6 52.905,83.38 U10.6@62.025,83.38 U10.1@64.025,83.38
pads on no net: S1. U3.1 U3.2 U3.3 U3.4 U3.5 U3.8 U3.11 U3.12 U3.13 U3.14 U3.15 U3.16 U3.17 U3.18 U6.5 U6.6 U6.7 U8.2 U8.3 U9.2 U9.3 U10.2 U10.3 U11.5 U12.5 U13.5 U14.1 U14.4 U14.5 U14.6 U14.7 U14.8 U18.7 U21.4 U21.5 U21.6 U21.7 U21.13 U21.14 U21.16 U21.17 U21.18 U21.19 U21.20 U21.21 U21.22 U21.23 U21.26 U21.27 U21.32

## Polygon pours and split planes (outlines as drawn)
GND_POWER on Bottom Layer "GND_POWER_L02_P022" (solid, remove dead copper, pour order 44): 80.8,4.575 ccw(c81.662,4.575) 81.662,3.713 84.531,3.713 cw(c84.531,2.763) 85.481,2.763 85.481,1.124 ccw(c86.339,1.124) 86.339,0.266 88.067,0.263 100.442,0.263 ccw(c100.442,1.288) 101.467,1.288 101.467,4.713 cw(c102.038,4.713) 102.038,5.285 122.217,5.285 cw(c122.217,4.273) 123.229,4.273 123.229,1.338 ccw(c124.404,1.338) 124.404,0.163 152.567,0.163 ccw(c152.567,1.267) 152.592,0.163 157.127,0.163 ccw(c157.127,2.703) 159.667,2.703 159.667,7.613 159.667,82.223 159.667,82.892 ccw(c159.067,82.892) 159.067,83.491 156.614,83.491 cw(c156.614,84.639) 155.467,84.639 155.467,88.638 ccw(c154.742,88.638) 154.742,89.363 151.992,89.363 87.842,89.363 83.332,89.438 ccw(c83.332,86.898) 80.792,86.898 80.792,81.346 ccw(c82.514,81.339) 80.792,81.338 80.792,7.497 ccw(c81.7,7.497) 80.8,7.374
GND_L on Bottom Layer "GND_L_L02_P018" (solid, remove dead copper, pour order 18): 6.779,1.338 ccw(c7.954,1.338) 7.954,0.163 77.204,0.163 ccw(c77.204,2.363) 79.404,2.363 79.404,61.788 ccw(c77.004,61.788) 77.004,64.188 1.554,64.188 ccw(c1.554,62.838) 0.204,62.838 0.204,54.713 ccw(c1.429,54.713) 1.429,53.488 6.829,53.488 cw(c6.829,52.388) 7.929,52.388 7.929,38.278 ccw(c10.469,38.278) 10.469,35.738 13.956,35.747 ccw(c14.004,36.919) 14.004,35.746 17.951,35.746 cw(c17.986,34.503) 19.229,34.538 19.229,23.463 cw(c18.604,23.463) 18.604,22.838 15.381,22.838 ccw(c15.381,22.313) 14.856,22.313 14.856,19.403 ccw(c15.6,19.407) 15.604,18.663 18.354,18.663 cw(c18.354,17.988) 19.029,17.988 19.029,8.778 cw(c16.489,8.778) 16.489,6.238 7.754,6.238 ccw(c7.754,5.263) 6.779,5.263
GND_POWER_A on Bottom Layer "GND_POWER_A_L02_P016" (solid, remove dead copper, pour order 16): 18.275,24.675 18.275,24.275 cw(c17.575,24.275) 17.575,23.575 12.325,23.575 ccw(c12.312,22.563) 11.3,22.575 11.3,19.425 cw(c10.325,19.425) 10.325,18.45 5.75,18.45 ccw(c5.75,17.5) 4.8,17.5 4.8,13.55 ccw(c5.2,13.55) 5.2,13.15 8.6,13.15 ccw(c8.6,13.75) 9.2,13.75 cw(c9.672,13.75) 9.672,14.222 11.733,14.222 ccw(c12.119,14.944) 12.119,14.125 14.675,14.125 cw(c14.675,13.5) 15.3,13.5 15.3,11.35 cw(c14.8,11.35) 14.8,10.85 12.056,10.85 ccw(c12.053,10.097) 11.3,10.1 11.3,8.95 cw(c9.875,8.95) 9.875,7.525 6.85,7.5 2.425,7.5 cw(c2.425,9.65) 0.275,9.65 0.275,51.35 cw(c1.325,51.35) 1.325,52.4 3.875,52.4 cw(c3.875,51.35) 4.925,51.35 4.925,50.925 4.925,47.1 4.925,36.097 ccw(c6.547,36.097) 6.547,34.475 17.208,34.475 cw(c17.217,33.417) 18.275,33.425 18.275,32.9
NetBT1_S1 on Bottom Layer "NETBT1_S1_L02_P010" (solid, remove dead copper, pour order 10): 117.275,60.498 cw(c119.815,60.498) 118.019,62.294 118.106,62.381 ccw(c116.31,64.177) 118.85,64.177 118.9,65.35 118.9,81.15 ccw(c118.625,81.15) 118.625,81.425 116.475,81.425 ccw(c116.475,80.925) 115.975,80.925 115.975,69.45 cw(c115.15,69.45) 115.15,68.625 114.175,68.625 97.933,68.625 cw(c97.933,69.708) 96.85,69.708 96.85,80.55 ccw(c96.45,80.55) 96.528,80.942 93.742,80.942 ccw(c93.742,80.7) 93.5,80.7 93.5,64.2 ccw(c94.65,64.2) 94.65,63.05 112.475,63.05 cw(c112.475,61.675) 113.85,61.675 113.85,50.225 cw(c113.35,50.225) 113.35,49.725 110.9,49.725 103.175,49.725 ccw(c103.175,48.35) 101.8,48.35 101.8,44.075 ccw(c102.45,44.075) 102.45,43.425 103.678,43.425 ccw(c103.678,43.822) 104.075,43.822 104.075,46.3 cw(c105.075,46.3) 105.075,47.3 116.5,47.3 ccw(c116.5,48.075) 117.275,48.075
GND_L on Top Layer "Top Layer-GND_L" (solid, pour order 47): 26.75,34.172 26.855,34.276 30.572,34.276 30.572,29.341 30.476,29.245 25.456,29.245 25.456,34.387 25.477,34.408 25.609,34.276 26.98,34.276
GND_L on Top Layer "GND_L_L01_P020" (solid, remove dead copper, pour order 20): 19.225,35.11 19.225,38.223 ccw(c16.685,38.223) 16.685,40.763 1.529,40.763 cw(c1.529,42.113) 0.179,42.113 0.179,61.51 cw(c2.719,61.51) 2.719,64.05 76.814,64.05 cw(c76.814,61.51) 79.354,61.51 79.354,2.038 cw(c77.504,2.038) 77.504,0.188 7.904,0.188 cw(c7.904,1.313) 6.78,1.313 cw(c7.854,1.363) 6.779,1.363 6.779,5.288 cw(c7.754,5.288) 7.754,6.263 16.489,6.263 ccw(c16.489,8.803) 19.029,8.803 19.029,18.013 ccw(c18.354,18.013) 18.354,18.688 15.404,18.688 cw(c15.404,19.039) 15.054,19.039 15.054,22.213 cw(c16.004,22.213) 16.004,23.163 18.429,23.163 ccw(c18.429,23.963) 19.229,23.963 19.229,35.038 ccw(c18.497,35.038)
GND_POWER on Top Layer "GND_POWER_L01_P024" (solid, remove dead copper, pour order 46): 159.666,78.365 159.666,82.494 ccw(c158.745,82.494) 158.745,83.415 156.643,83.415 cw(c156.643,84.692) 155.366,84.692 155.366,88.503 ccw(c154.453,88.503) 154.453,89.415 151.816,89.415 88.067,89.415 83.331,89.415 ccw(c83.331,86.875) 80.791,86.875 80.791,81.39 80.791,7.549 80.791,4.635 ccw(c81.661,4.635) 81.661,3.765 84.611,3.765 cw(c84.611,2.942) 85.434,2.942 85.434,1.222 ccw(c86.344,1.216) 86.338,0.306 88.006,0.315 ccw(c88.024,1.677) 88.025,0.315 100.441,0.315 ccw(c100.441,1.34) 101.466,1.34 101.466,4.765 cw(c102.038,4.765) 102.038,5.337 122.216,5.337 cw(c122.216,4.324) 123.228,4.324 123.228,1.39 ccw(c124.403,1.39) 124.403,0.215 152.566,0.215 ccw(c152.566,1.314) 152.666,0.22 157.12,0.215 ccw(c157.12,2.755) 159.66,2.755 159.66,7.547 ccw(c158.467,7.665) 159.666,7.665
NetC58_1 on Top Layer "NETC58_1_L01_P008" (solid, remove dead copper, pour order 8): 125.15,11.025 cw(c125.55,11.025) 125.55,11.425 125.733,11.425 ccw(c125.733,11.664) 125.972,11.664 125.972,18.097 cw(c126.575,18.097) 126.575,18.7 131.25,18.7 cw(c131.25,18.183) 131.767,18.183 131.767,11.697 ccw(c131.787,11.684) 131.775,11.664 131.775,6.8 cw(c131.45,6.8) 131.45,6.475 119.35,6.475 cw(c119.35,6.65) 119.175,6.65 119.175,7.375 cw(c119.447,7.375) 119.447,7.647 127.4,7.647 cw(c127.428,7.647) 127.428,7.675 127.942,7.675 ccw(c127.942,7.783) 128.05,7.783 128.05,9.175 ccw(c127.8,9.175) 127.8,9.425 125.522,9.425 cw(c125.522,9.797) 125.15,9.797
GND_POWER_A on Top Layer "+" (solid, pour order 36): 14.925,31.464 9.108,31.464 ccw(c9.108,30.625) 8.269,30.625 8.269,29.106 cw(c7.65,29.106) 7.65,28.487 5.588,28.487 cw(c5.588,29.2) 4.875,29.2 4.875,35.412 cw(c5.7,35.412) 5.7,36.237 13.112,36.237 13.65,36.775 14.595,36.775 ccw(c14.595,37.148) 14.968,37.148 14.968,37.893 cw(c15.2,37.893) 15.2,38.125 17.071,38.125 cw(c17.071,37.725) 17.471,37.725 17.471,32.039 cw(c16.907,32.039) 16.907,31.475
NetC1_2 on Top Layer "NETC1_2_L01_P012" (solid, remove dead copper, pour order 12): 11.891,30.45 ccw(c11.891,29.012) 10.453,29.012 cw(c10.2,28.85) 10.5,28.85 10.5,26.975 ccw(c11,26.975) 11,26.475 15.425,26.475 ccw(c15.425,26.7) 15.65,26.7 15.65,28.775 cw(c16.075,28.775) 16.075,29.2 18.509,29.2 ccw(c18.509,29.375) 18.684,29.375 18.684,30.366 ccw(c18.6,30.366) 18.6,30.45
NetC52_2 on Top Layer "NETC52_2_L01_P006" (solid, remove dead copper, pour order 6): 116.121,30.82 121.221,30.82 121.946,30.82 ccw(c121.946,31.145) 122.271,31.145 122.271,33.145 cw(c122.621,33.145) 122.621,33.495 127.296,33.495 ccw(c127.296,33.845) 127.646,33.845 127.646,34.67 ccw(c127.421,34.67) 127.421,34.895 122.696,34.895 cw(c122.696,35.295) 122.296,35.295 122.296,37.32 ccw(c122.021,37.32) 122.021,37.595 116.121,37.595
5VCC on Top Layer "5VCC_L01_P004" (solid, remove dead copper, pour order 4): 132.941,43.54 ccw(c132.941,42.37) 131.771,42.37 131.771,39.635 cw(c131.256,39.635) 131.256,39.12 125.823,39.12 ccw(c125.823,38.695) 125.398,38.695 125.398,36.244 ccw(c125.671,36.244) 125.671,35.97 134.671,35.97 ccw(c134.671,36.895) 134.799,35.979 ccw(c134.8,36.52) 135.341,36.52 135.341,41.57 cw(c136.15,41.57) 136.15,42.38 137.021,42.38 ccw(c137.021,42.613) 137.254,42.613 137.254,43.445 ccw(c137.158,43.445) 137.158,43.541
5VCC on Top Layer "5VCC_L01_P014" (solid, remove dead copper, pour order 14): 4.775,25.15 cw(c4.775,26.4) 3.525,26.4 3.525,38.775 ccw(c2.85,38.775) 2.85,39.45 1.025,39.45 ccw(c1.025,38.7) 0.275,38.7 0.275,10.325 ccw(c1.9,10.325) 1.9,8.7 6.628,8.7 ccw(c6.628,11.24) 8.424,9.444 14.38,15.4 ccw(c12.823,16.957) 15.025,16.957 15.025,18.075 ccw(c14.675,18.075) 14.675,18.425 12.367,18.425 ccw(c12.371,17.954) 11.9,17.95 11.9,16.825 cw(c11.115,16.825) 11.67,16.27 9.244,13.844 cw(c7.448,15.64) 7.448,13.1 5.218,13.1 cw(c5.218,13.768) 4.55,13.768 4.55,20.793 cw(c6.74,20.793) 4.561,21.008 4.561,22.283 cw(c5.153,22.283) 5.153,22.875 7.625,22.875 ccw(c7.625,23.275) 8.025,23.275 8.025,24.675 ccw(c7.55,24.675) 7.55,25.15

## Keep-outs
Keep-Out Layer:
  circle w0.2: c151,9 r2.401
  circle w0.2: c151,81 r2.401
  circle w0.2: c89,81 r2.401
  circle w0.2: c35.633,9.304 r4
  circle w0.2: c89,87 r3
  circle w0.2: c151,87 r3
  circle w0.2: c151,3 r3
  circle w0.2: c89,3 r3
  circle w0.2: c71,3 r3
  circle w0.2: c71,87 r3
  circle w0.2: c9,87 r3
  circle w0.2: c9,3 r3

## Other copper
Top Layer:
  rectangle net GND_POWER: 88.95,44.755 97.875,46.755
  pour cut-out: 54.48,53.147 54.48,53.417 ccw(c53.575,53.417) 53.575,54.322 54.608,54.322 cw(c54.608,53.876) 55.054,53.876
  pour cut-out: 129.813,90 159.737,90 159.738,49.394 129.812,49.394
  pour cut-out: 140.85,13.285 140.85,9.344 146.825,9.344 146.825,13.285
  pour cut-out: 140.85,15.178 140.85,18.634 149.154,18.634 149.154,15.178
  pour cut-out: 122.781,32.986 122.781,30.818 124.621,30.818 124.621,32.986
  pour cut-out: 150.94,15.178 150.94,13.285 140.85,13.285 140.85,15.178
  pour cut-out: 151.59,13.28 155.804,13.28 155.804,11.325 151.59,11.325
  pour cut-out: 97.575,9.076 97.575,7.625 100.785,7.625 100.785,9.076
  pour cut-out: 121.652,13.925 122.678,13.925 122.678,8.836 121.647,8.836 121.647,13.903
  pour cut-out: 96.45,47.825 96.45,43.562 100.8,43.562 100.8,45.946 99.075,47.671 99.075,48.425 99.05,48.45 97.024,48.45
  pour cut-out: 122.582,37.92 122.582,35.37 124.875,35.37 124.875,37.92
  pour cut-out: 106.712,21.839 104.3,21.839 104.3,22.775 106.712,22.775
  text "'.Layer_Name'" at 141.85,-16.2 h3
Bottom Layer:
  pour cut-out: 97.011,45.85 97.011,47.013 cw(c97.475,47.013) 97.475,47.477 98.948,47.477 cw(c98.948,47.125) 99.3,47.125 99.3,44.675 cw(c98.825,44.675) 98.825,44.2 97.425,44.2 cw(c97.425,44.6) 97.025,44.6
  pour cut-out: 57.875,52.45 58.733,52.45 cw(c58.733,52.15) 59.033,52.15 59.033,49.558 cw(c58.7,49.558) 58.7,49.225 58.175,49.225 cw(c58.175,49.55) 57.85,49.55
  pour cut-out: 35.186,52.4 36.045,52.4 cw(c36.045,52.1) 36.345,52.1 36.345,49.508 cw(c36.011,49.508) 36.011,49.175 35.486,49.175 cw(c35.486,49.5) 35.161,49.5
  pour cut-out: 12.706,52.455 13.564,52.455 cw(c13.564,52.155) 13.864,52.155 13.864,49.563 cw(c13.531,49.563) 13.531,49.23 13.006,49.23 cw(c13.006,49.555) 12.681,49.555
  pour cut-out: 160,90 128.675,90 128.675,49.398 128.671,49.394 160,49.394
  text "'.Layer_Name'" at 159.609,-19.95 h3

## Silkscreen, mask and mechanical layers (free items; w line width, h text height)
Bottom Overlay:
  text "Viliso Technologies LLP" at 34.288,0.745 h2
  text "Viliso Technologies LLP" at 147.875,-27.625 h2
Top Solder:
  rectangle: 88.95,44.715 97.889,46.75
Mechanical 1:
  circle w0.5: c35.633,9.304 r4
  lines w0.2: 80.6,90.575 90,101.05 ; 80.532,90.548 80.532,91.448 81.032,90.823 81.332,90.323 80.532,90.548
  lines w0.5: 80,70 80,90 ; 0,0 0,90 160,90 160,0 0,0
  lines w1: 80,0 80,90
  text "V-CUT" at 90.45,100.4 h4
  text "Board" at 33.1,10.1 h2
  text "Cut out" at 32.533,7.8 h2
Drill Drawing:
  text ".Legend" at 186.6,2.875 h3

## Dimensions
89,87 to 151,87 on Mechanical 1
71,3 to 80,0 on Mechanical 1
9,3 to 0,0 on Mechanical 1
80,90 to 70.925,87 on Mechanical 1
89,87 to 80,90 on Mechanical 1
89,87 to 89,81 on Mechanical 1
89,3 to 80,0 on Mechanical 1
151,3 to 160,0 on Mechanical 1
151,81 to 151,87 on Mechanical 1
9,87 to 0,90 on Mechanical 1
151,3 to 151,9 on Mechanical 1
80,90 to 160,90 on Mechanical 1
160,0 to 160,90 on Mechanical 1
0,0 to 160,0 on Mechanical 1
9,87 to 70.925,87 on Mechanical 1
9,87 to 9,3 on Mechanical 1
0,90 to 0,0 on Mechanical 1
80,90 to 0,90 on Mechanical 1
151,87 to 160,90 on Mechanical 1
151,87 to 160,90 on Mechanical 1

## Text inside footprints (layer, text, board x,y; h text height)
BT1: Mechanical 13 "Battery Enter From This Side" at 118.2,66.9 h2
C16: Top Overlay "+" at 7.65,10.95 h2 r90
C49: Top Overlay "+" at 129.35,51.925 h2 r180
C58: Top Overlay "+" at 131.275,12.35 h2 r90
D2: Top Overlay "K" at 135.641,41.603 h1 r180
J2: Top Overlay "1" at 81.95,5.78 h1.5 r270
P5: Top Overlay "1" at 143,1.222 h1.5; Top Overlay "2" at 136.3,1.222 h1.5
U4: Top Overlay "1" at 12.3,11.5 h1.5; Top Overlay "2" at 12.3,8.032 h1.5; Top Overlay "3" at 18.702,8.05 h1.5; Top Overlay "4" at 18.777,11.5 h1.5
U8: Top Overlay "5" at 17.775,63.34 h1.5 r180; Top Overlay "4" at 19.775,63.34 h1.5 r180; Top Overlay "1" at 19.8,86.34 h1.5 r180; Top Overlay "6" at 17.775,86.44 h1.5 r180; Top Overlay "2" at 29.925,76 h1.5 r180; Top Overlay "3" at 29.925,74 h1.5 r180; Mechanical 1 "Board" at 22.325,73.915 h3 r180; Mechanical 1 "Cut out" at 23.067,76.64 h3 r180
U9: Top Overlay "5" at 40.075,63.34 h1.5 r180; Top Overlay "4" at 42.075,63.34 h1.5 r180; Top Overlay "1" at 42.1,86.34 h1.5 r180; Top Overlay "6" at 40.075,86.44 h1.5 r180; Top Overlay "2" at 52.25,76 h1.5 r180; Top Overlay "3" at 52.25,73.975 h1.5 r180; Mechanical 1 "Board" at 44.625,73.915 h3 r180; Mechanical 1 "Cut out" at 45.367,76.64 h3 r180
U10: Top Overlay "5" at 62.375,63.34 h1.5 r180; Top Overlay "4" at 64.375,63.34 h1.5 r180; Top Overlay "1" at 64.4,86.34 h1.5 r180; Top Overlay "6" at 62.375,86.44 h1.5 r180; Top Overlay "2" at 74.8,75.965 h1.5 r180; Top Overlay "3" at 74.8,73.965 h1.5 r180; Mechanical 1 "Board" at 66.925,73.915 h3 r180; Mechanical 1 "Cut out" at 67.667,76.64 h3 r180
U14: Top Overlay "A" at 48.875,28.7 h1; Top Overlay "B" at 48.95,27.35 h1; Top Overlay "J" at 53.925,32.075 h1; Top Overlay "H" at 56.325,28.625 h1
U17: Top Overlay "1" at 99,54.625 h1.5
U21: Top Overlay "1" at 118.817,6.202 h1.2 r180; Top Overlay "15" at 118.067,22.032 h1.2 r180; Top Overlay "24" at 106.617,22.046 h1.2 r180; Top Overlay "38" at 105.792,6.202 h1.2 r180
U23: Top Overlay "1" at 159.15,75.37 h1.5 r90